# EAGLE board test1 (EAGLE 9.6.2)
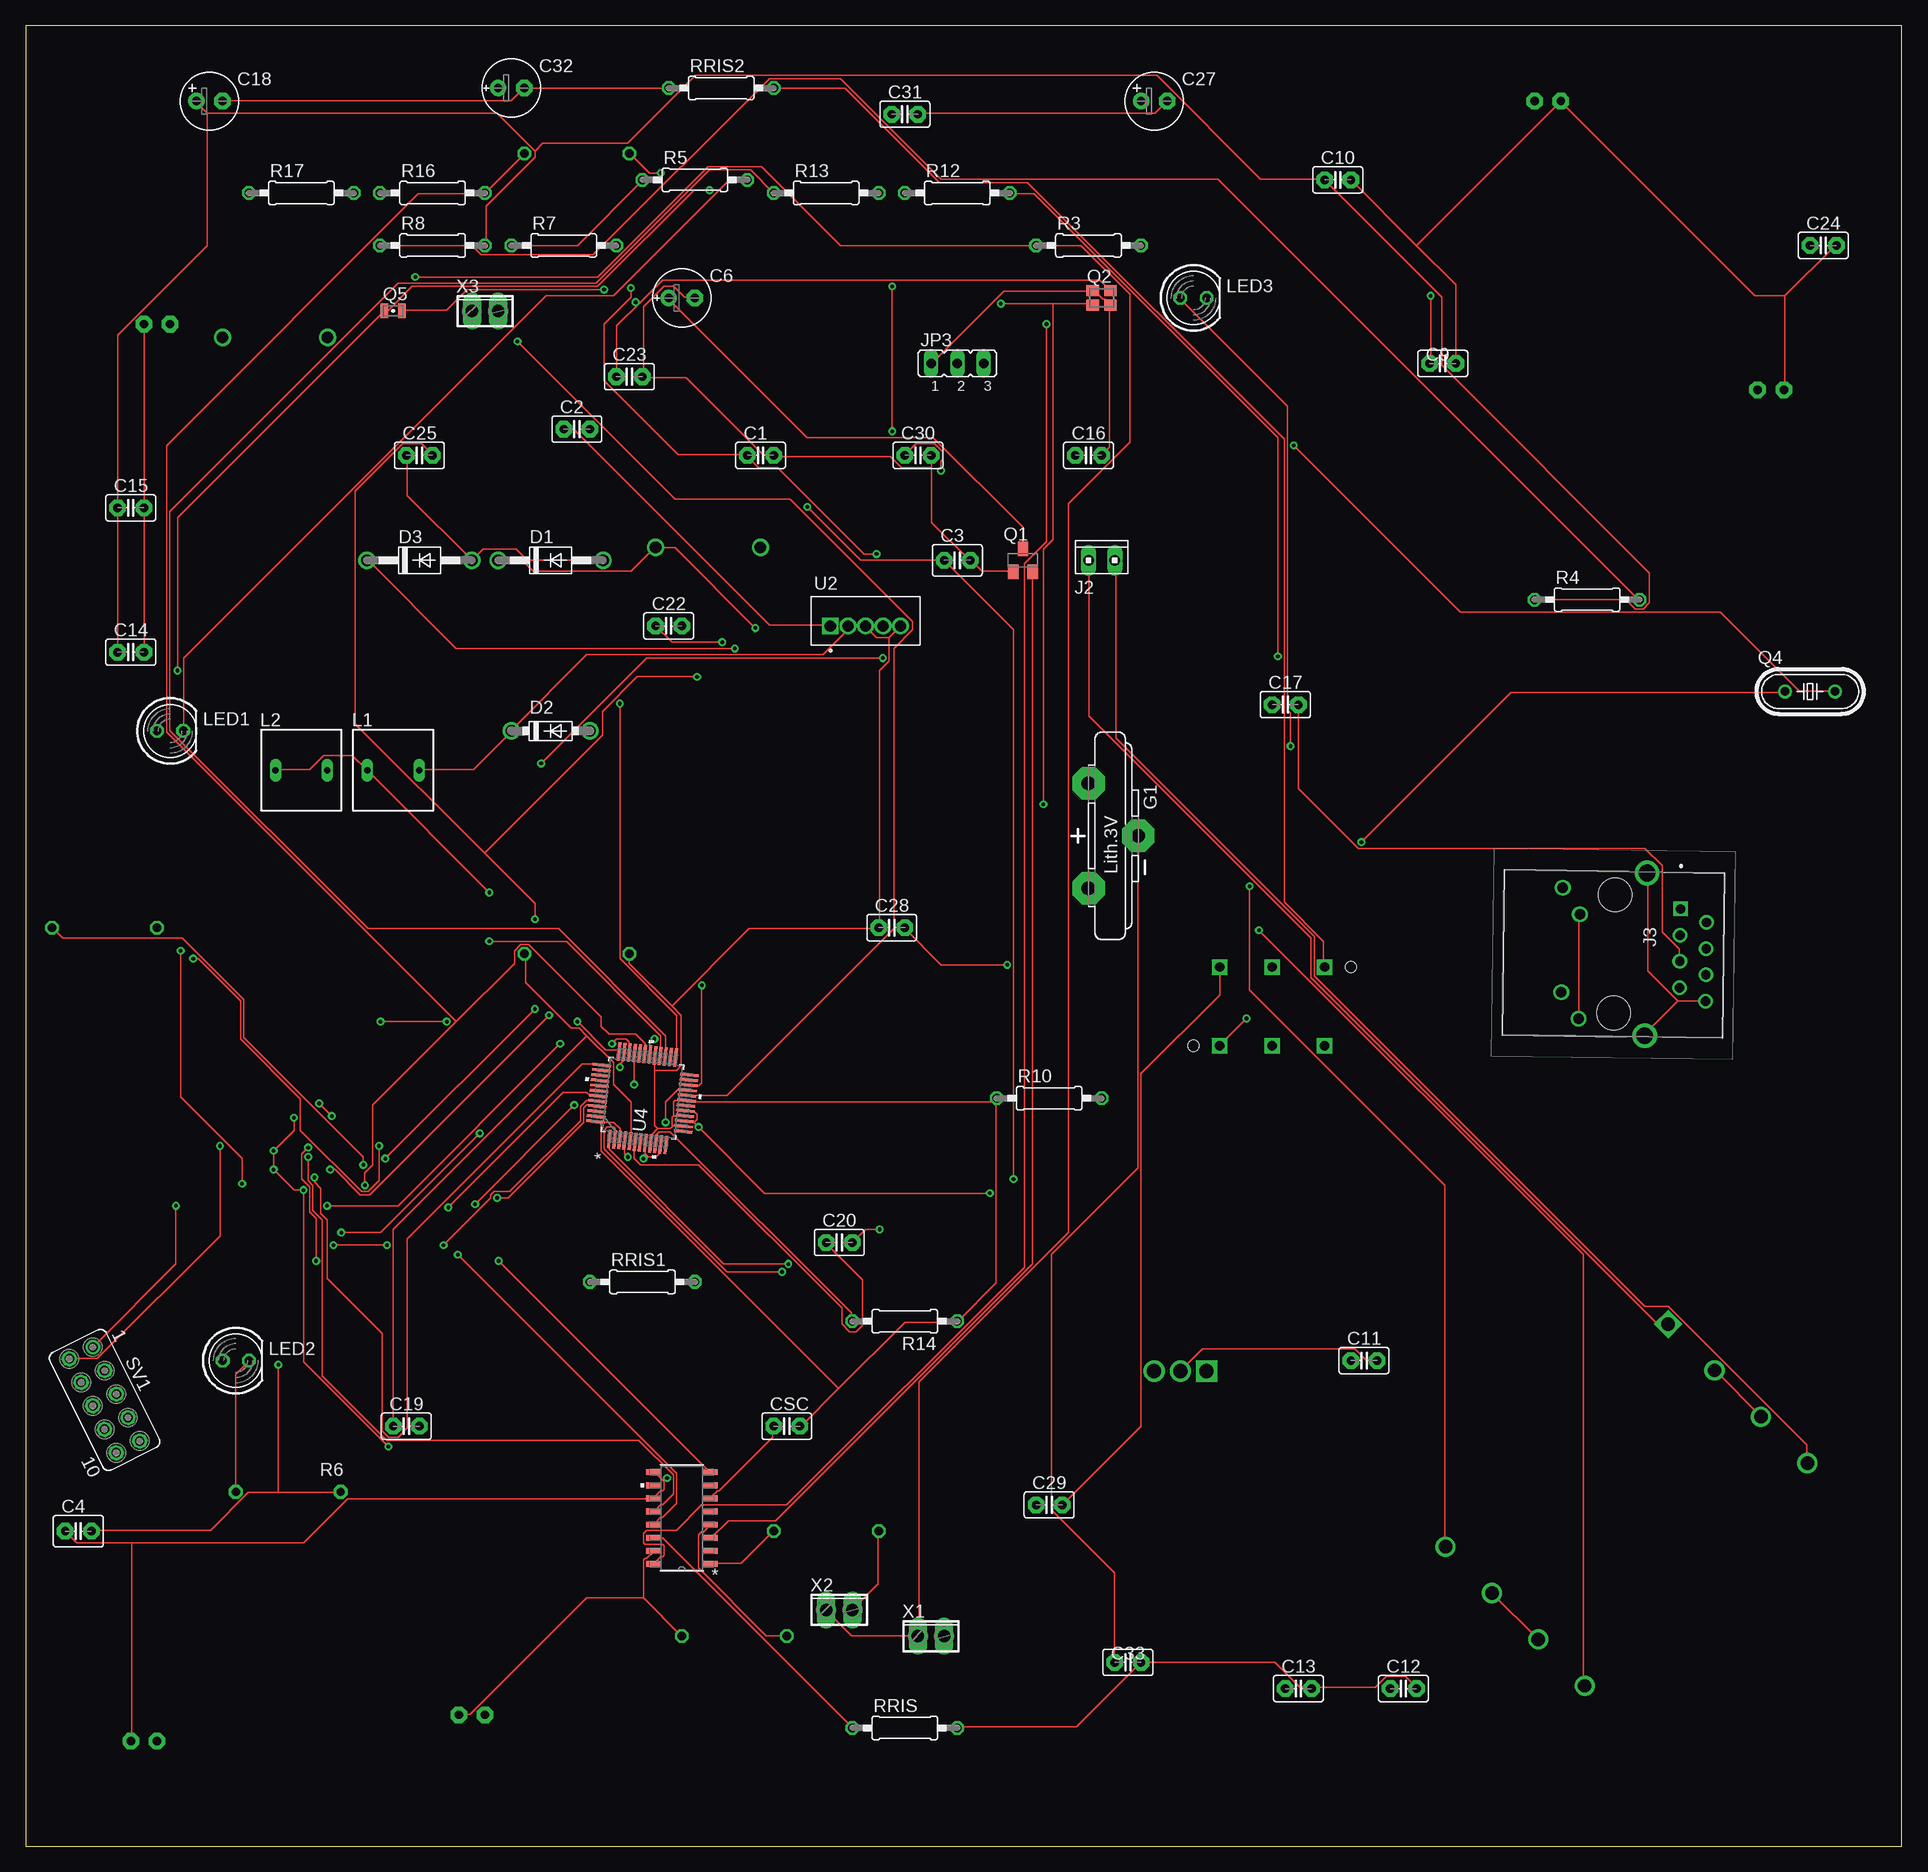
[diagram p0: board, top side]
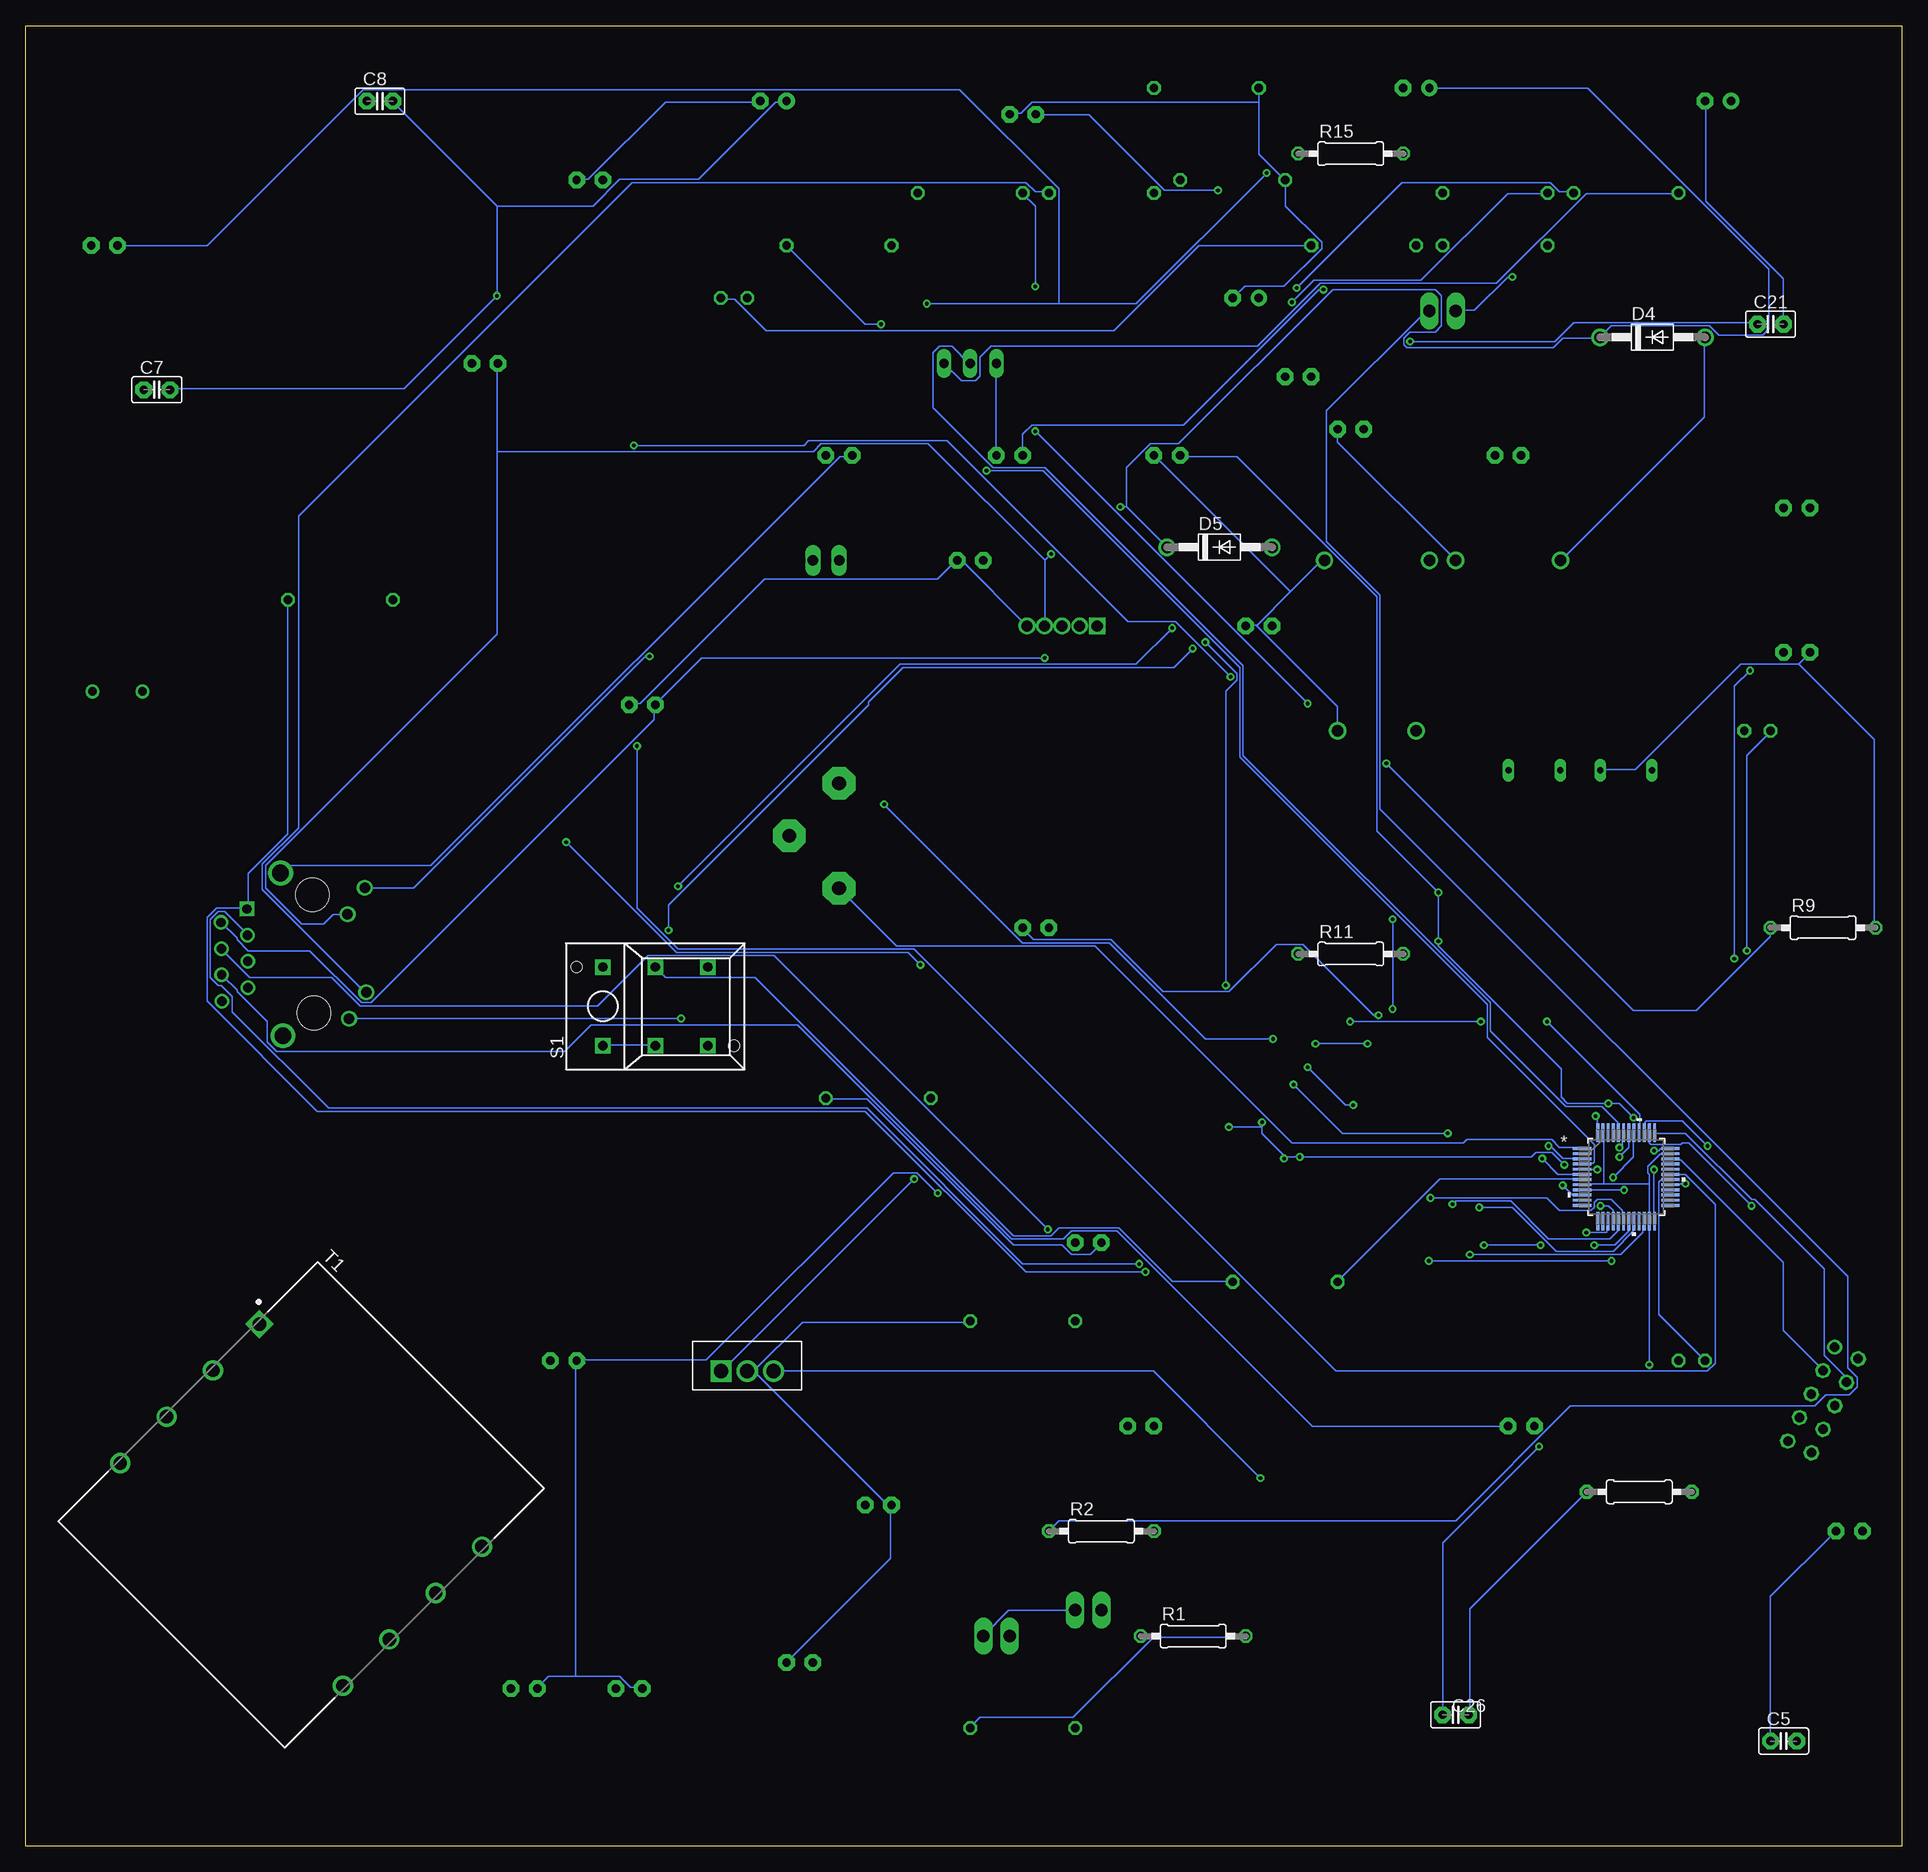
[diagram p1: board, bottom side, seen from below]

Size 181.59 x 176.2 mm. Coordinates in mm from the lower left corner, seen from the top.
Outline: 0,0 181.59,0 181.59,176.2 0,176.2 0,0
Copper layers (1*16): Top 0.035mm / dielectric 1.5mm / Bottom 0.035mm
Design rules "default": minimum track width 6mil, minimum drill 0.35mm, track to track 6mil, track to pad 6mil, pad to pad 6mil, via to via 6mil, smd to smd 6mil, copper to edge 40mil, drill to drill 6mil, minimum pad ring 10mil, minimum via ring 8mil, stop-mask expansion 4mil, vias tented up to drill 0mil, thermal gap 10mil

## Footprints (pad centres in the part's own frame; a part is rotated, then mirrored left to right if it is on the bottom)
C2.5-2 = drill 0.813 pad 1.6 octagon: 1 -1.27,0; 2 1.27,0
C2.5-3 = drill 0.813 pad 1.6 octagon: 1 -1.27,0; 2 1.27,0
E2,5-6E = drill 0.813 pad 1.575: + -1.27,0 | drill 0.813 pad 1.575 octagon: - 1.27,0
E2,5-6 = drill 0.813 pad 1.6: + -1.27,0 | drill 0.813 pad 1.6 octagon: - 1.27,0
DO41-10 = drill 1.118: A 5.08,0; C -5.08,0
DO41-7.6 = drill 1.1 pad 1.7: A 3.81,0; C -3.81,0
CR2032V = drill 1.321 pad 3.15 octagon: + -2.54,-5.08; +@1 -2.54,5.08; - 2.286,0
10X02MTA = drill 1.016 long: 1 1.27,0; 2 -1.27,0
J1B1211CCD = drill 0.9 pad 1.4 square: 1 -4.445,6.45 | drill 0.9 pad 1.4: 2 -3.175,8.99; 3 -1.905,6.45; 4 -0.635,8.99; 5 0.635,6.45; 6 1.905,8.99; 7 3.175,6.45; 8 4.445,8.99 | drill 1.02 pad 1.53: 9 -6.325,-4.98; 10 -3.785,-3.28; 11 3.785,-4.98; 12 6.325,-3.28 | drill 1.6 pad 2.4: 13 -7.875,3.15; 14 7.875,3.15 | hole 3.25: -5.715,0.1; 5.715,0.1
JP2 = drill 0.914 long: 1 -2.54,0; 2 0,0; 3 2.54,0
SD8 = drill 0.6 long: 1 -2.5,0; 2 2.5,0
LED5MM = drill 0.813 octagon: A -1.27,0; K 1.27,0
SOT23 = smd 1 x 1.4: 1 -0.95,-1.1; 2 0.95,-1.1; 3 0,1.1
FA-20H = smd 1.2 x 1.1: 1 -0.85,-0.7; 2 0.85,-0.7; 3 0.85,0.7; 4 -0.85,0.7
HC49/S = drill 0.813: 1 -2.413,0; 2 2.413,0
FC-12M = smd 0.7 x 1.4: 1 -0.85,0; 2 0.85,0
0207/10 = drill 0.813 octagon: 1 -5.08,0; 2 5.08,0
5501-1LED = drill 0.9 pad 1.5 square: 1A 0,3.81; 1B 0,-3.81; + -5.08,-3.81; - -5.08,3.81; NC 5.08,-3.81; NO 5.08,3.81 | hole 1.1: -7.62,3.81; 7.62,-3.81
FE05-2 = drill 0.914: 1 -5.08,1.27 | drill 0.914 octagon: 2 -5.08,-1.27; 3 -2.54,1.27; 4 -2.54,-1.27; 5 0,1.27; 6 0,-1.27; 7 2.54,1.27; 8 2.54,-1.27; 9 5.08,1.27; 10 5.08,-1.27
XFMR_3FD-312 = drill 1.3 square: 1 -15.24,9.525 | drill 1.3: 2 -15.24,3.175; 3 -15.24,-3.175; 4 -15.24,-9.525; 5 15.24,9.525; 6 15.24,3.175; 7 15.24,-3.175; 8 15.24,-9.525
LQFP48_STM-M = smd 1.778 x 0.279: 1 -4.267,2.75; 2 -4.267,2.25; 3 -4.267,1.75; 4 -4.267,1.25; 5 -4.267,0.75; 6 -4.267,0.25; 7 -4.267,-0.25; 8 -4.267,-0.75; 9 -4.267,-1.25; 10 -4.267,-1.75; 11 -4.267,-2.25; 12 -4.267,-2.75; 25 4.267,-2.75; 26 4.267,-2.25; 27 4.267,-1.75; 28 4.267,-1.25; 29 4.267,-0.75; 30 4.267,-0.25; 31 4.267,0.25; 32 4.267,0.75; 33 4.267,1.25; 34 4.267,1.75; 35 4.267,2.25; 36 4.267,2.75 | smd 0.279 x 1.778: 13 -2.75,-4.267; 14 -2.25,-4.267; 15 -1.75,-4.267; 16 -1.25,-4.267; 17 -0.75,-4.267; 18 -0.25,-4.267; 19 0.25,-4.267; 20 0.75,-4.267; 21 1.25,-4.267; 22 1.75,-4.267; 23 2.25,-4.267; 24 2.75,-4.267; 37 2.75,4.267; 38 2.25,4.267; 39 1.75,4.267; 40 1.25,4.267; 41 0.75,4.267; 42 0.25,4.267; 43 -0.25,4.267; 44 -0.75,4.267; 45 -1.25,4.267; 46 -1.75,4.267; 47 -2.25,4.267; 48 -2.75,4.267
TO170P1054X470X1514-5 = drill 1.08 pad 1.48 square: 1 -3.4,0 | drill 1.08 pad 1.48: 2 -1.7,0; 3 0,0; 4 1.7,0; 5 3.4,0
T03B = drill 1.372 pad 1.88 square: 1 -5.08,-1.016 | drill 1.372 pad 1.88: 2 -2.54,-1.016; 3 0,-1.016
48LQFP_W5500_WIZ-M = smd 1.778 x 0.279: 1 -4.267,2.75; 2 -4.267,2.25; 3 -4.267,1.75; 4 -4.267,1.25; 5 -4.267,0.75; 6 -4.267,0.25; 7 -4.267,-0.25; 8 -4.267,-0.75; 9 -4.267,-1.25; 10 -4.267,-1.75; 11 -4.267,-2.25; 12 -4.267,-2.75; 25 4.267,-2.75; 26 4.267,-2.25; 27 4.267,-1.75; 28 4.267,-1.25; 29 4.267,-0.75; 30 4.267,-0.25; 31 4.267,0.25; 32 4.267,0.75; 33 4.267,1.25; 34 4.267,1.75; 35 4.267,2.25; 36 4.267,2.75 | smd 0.279 x 1.778: 13 -2.75,-4.267; 14 -2.25,-4.267; 15 -1.75,-4.267; 16 -1.25,-4.267; 17 -0.75,-4.267; 18 -0.25,-4.267; 19 0.25,-4.267; 20 0.75,-4.267; 21 1.25,-4.267; 22 1.75,-4.267; 23 2.25,-4.267; 24 2.75,-4.267; 37 2.75,4.267; 38 2.25,4.267; 39 1.75,4.267; 40 1.25,4.267; 41 0.75,4.267; 42 0.25,4.267; 43 -0.25,4.267; 44 -0.75,4.267; 45 -1.25,4.267; 46 -1.75,4.267; 47 -2.25,4.267; 48 -2.75,4.267
D16_TEX = smd 1.46 x 0.559: 1 -2.724,4.445; 2 -2.724,3.175; 3 -2.724,1.905; 4 -2.724,0.635; 5 -2.724,-0.635; 6 -2.724,-1.905; 7 -2.724,-3.175; 8 -2.724,-4.445; 9 2.724,-4.445; 10 2.724,-3.175; 11 2.724,-1.905; 12 2.724,-0.635; 13 2.724,0.635; 14 2.724,1.905; 15 2.724,3.175; 16 2.724,4.445
2POL254 = drill 1.2 long: 1 -1.27,0; 2 1.27,0

## Placement (x,y rotation side)
C1  330uF  [C2.5-2]  71.12,134.62 0 top
C2  100uF  [C2.5-2]  53.34,137.16 0 top
C3  44uC  [C2.5-3]  90.17,124.46 0 top
C4  22uC  [C2.5-3]  5.08,30.48 0 top
C5  10uF  [C2.5-2]  11.43,10.16 0 bottom
C6  300  [E2,5-6E]  63.5,149.86 0 top
C7  0.1u  [C2.5-2]  168.91,140.97 0 bottom
C8  0.1u  [C2.5-2]  147.32,168.91 0 bottom
C9  0.1u  [C2.5-2]  137.16,143.51 0 top
C10  0.1u  [C2.5-2]  127,161.29 0 top
C11  0.1u  [C2.5-2]  129.54,46.99 0 top
C12  0.1u  [C2.5-2]  133.35,15.24 0 top
C13  0.1u  [C2.5-2]  123.19,15.24 0 top
C14  o.1u  [C2.5-2]  10.16,115.57 0 top
C15  0.1u  [C2.5-2]  10.16,129.54 0 top
C16  1nF/2kV  [C2.5-2]  102.87,134.62 0 top
C17  22n  [C2.5-2]  121.92,110.49 0 top
C18  10u  [E2,5-6]  17.78,168.91 0 top
C19  22n  [C2.5-2]  36.83,40.64 0 top
C20  22n  [C2.5-2]  78.74,58.42 0 top
C21  4.7uF  [C2.5-2]  12.7,147.32 0 bottom
C22  10nF  [C2.5-2]  62.23,118.11 0 top
C23  18p  [C2.5-2]  58.42,142.24 0 top
C24  18p  [C2.5-2]  173.99,154.94 0 top
C25  12uF  [C2.5-2]  38.1,134.62 0 top
C26  0.1u  [C2.5-2]  43.18,12.7 0 bottom
C27  10u  [E2,5-6]  109.22,168.91 0 top
C28  12uF  [C2.5-2]  83.82,88.9 0 top
C29  12uF  [C2.5-2]  99.06,33.02 0 top
C30  12.5uF  [C2.5-2]  86.36,134.62 0 top
C31  12.5uF  [C2.5-2]  85.09,167.64 0 top
C32  470uF  [E2,5-6E]  46.99,170.18 0 top
C33  1u  [C2.5-2]  106.68,17.78 0 top
CSC  10uF  [C2.5-2]  73.66,40.64 0 top
D1  1N4004  [DO41-10]  50.8,124.46 0 top
D2  1N5819-B  [DO41-7.6]  50.8,107.95 0 top
D3  1N4004  [DO41-10]  38.1,124.46 0 top
D4  1N4004  [DO41-10]  24.13,146.05 0 bottom
D5  1N4004  [DO41-10]  66.04,125.73 0 bottom
G1  CR2032V  [CR2032V]  105.41,97.79 0 top
J2  230V  [10X02MTA]  104.14,124.46 0 top
J3  J1B1211CCD  [J1B1211CCD]  153.67,86.36 269.2 top
JP3  [JP2]  90.17,143.51 0 top
L1  [SD8]  35.56,104.14 0 top
L2  [SD8]  26.67,104.14 0 top
LED1  [LED5MM]  13.97,107.95 0 top
LED2  [LED5MM]  20.32,46.99 0 top
LED3  [LED5MM]  113.03,149.86 0 top
Q1  BSS84  [SOT23]  96.52,124.46 0 top
Q2  29MHz  [FA-20H]  104.14,149.86 0 top
Q4  [HC49/S]  172.72,111.76 0 top
Q5  32.768  [FC-12M]  35.56,148.59 0 top
R1  30k  [0207/10]  68.58,20.32 0 bottom
R2  220  [0207/10]  77.47,30.48 0 bottom
R3  220  [0207/10]  102.87,154.94 0 top
R4  49.9 1%  [0207/10]  151.13,120.65 0 top
R5  [0207/10]  64.77,161.29 0 top
R6  [0207/10]  25.4,34.29 0 bottom
R7  [0207/10]  52.07,154.94 0 top
R8  49.9 1%  [0207/10]  39.37,154.94 0 top
R9  49.9 1%  [0207/10]  7.62,88.9 0 bottom
R10  49R9 1%  [0207/10]  99.06,72.39 0 top
R11  49R9 1%  [0207/10]  53.34,86.36 0 bottom
R12  49.9 1%  [0207/10]  90.17,160.02 0 top
R13  49.9 1%  [0207/10]  77.47,160.02 0 top
R14  12.4k  [0207/10]  85.09,50.8 180 top
R15  1M  [0207/10]  53.34,163.83 0 bottom
R16  0R  [0207/10]  39.37,160.02 0 top
R17  10K  [0207/10]  26.67,160.02 0 top
RRIS  30k  [0207/10]  85.09,11.43 0 top
RRIS1  30k  [0207/10]  59.69,54.61 0 top
RRIS2  30k  [0207/10]  67.31,170.18 0 top
S1  5501-1LED  [5501-1LED]  120.65,81.28 0 bottom
SV1  [FE05-2]  7.62,43.18 296.5 top
T1  3FD-312  [XFMR_3FD-312]  154.94,33.02 315 bottom
U1  STM32F103C8T6LQFP48_STM-M  [LQFP48_STM-M]  26.67,64.77 0 bottom
U2  LM2576-3.3WT  [TO170P1054X470X1514-5]  81.28,118.11 0 top
U3  LM2940CT-5.0/NOPBT03B  [T03B]  109.22,46.99 0 bottom
U4  W550048LQFP_W5500_WIZ-M  [48LQFP_W5500_WIZ-M]  59.69,72.39 83.7 top
U5  TSS721ADD16_TEX  [D16_TEX]  63.5,31.75 180 top
X1  [2POL254]  87.63,20.32 0 top
X2  [2POL254]  78.74,22.86 0 top
X3  [2POL254]  44.45,148.59 0 top

## Library data of the parts
C1-C5 C7-C17 C19-C26 C28-C31 C33 CSC = capacitor-wima
C6 C18 C27 C32 = rcl; SPICEPREFIX: C
D1-D5 = diode
G1 = battery
J2 = con-amp
J3 = J1B1211CCD; DESCRIPTION: Modules Accessories RJ-45 w/ Transformer Connector /CETUS; HEIGHT: mm; MANUFACTURER_NAME: WIZnet Inc; MANUFACTURER_PART_NUMBER: J1B1211CCD
JP3 = jumper
L1 L2 = inductor-neosid; OC_FARNELL: unknown; OC_NEWARK: unknown
LED1-LED3 = led
Q1 = transistor-small-signal
Q2 Q5 = crystal
Q4 = crystal; OC_FARNELL: 1667008; OC_NEWARK: unknown
R1-R17 RRIS RRIS1 RRIS2 = rcl; SPICEPREFIX: R
S1 = switch
SV1 = con-lsta; OC_FARNELL: unknown; OC_NEWARK: unknown
T1 = 3FD-312; AVAILABILITY: In Stock; CHECK_PRICES: https://www.snapeda.com/parts/3FD-312/Tamura/view-part/?ref=eda; DESCRIPTION: PWR XFMR LAMINATED 2.4VA TH; MF: Tamura; MP: 3FD-312; PACKAGE: None; PRICE: None; PURCHASE-URL: https://www.snapeda.com/api/url_track_click_mouser/?unipart_id=283554&manufacturer=Tamura&part_name=3FD-312&search_term=tamura 3fd-312 (transformer); SNAPEDA_LINK: https://www.snapeda.com/parts/3FD-312/Tamura/view-part/?ref=snap
U1 = FYPmcu; COPYRIGHT: Copyright (C) 2024 Ultra Librarian. All rights reserved.; MANUFACTURER_PART_NUMBER: STM32F103C8T6; MFR_NAME: STMicroelectronics
U2 = LM2576-3.3WT; AVAILABILITY: In Stock; CHECK_PRICES: https://www.snapeda.com/parts/LM2576-3.3WT/Microchip/view-part/?ref=eda; DESCRIPTION: Buck Switching Regulator IC Positive Fixed 3.3V 1 Output 3A TO-220-5; MF: Microchip; MP: LM2576-3.3WT; PACKAGE: TO-220 Microchip; PRICE: None; PURCHASE-URL: https://www.snapeda.com/api/url_track_click_mouser/?unipart_id=681089&manufacturer=Microchip&part_name=LM2576-3.3WT&search_term=lm2576-3.3; SNAPEDA_LINK: https://www.snapeda.com/parts/LM2576-3.3WT/Microchip/view-part/?ref=snap
U3 = FYPrugu5; COPYRIGHT: Copyright (C) 2024 Ultra Librarian. All rights reserved.; MANUFACTURER_PART_NUMBER: LM2940CT-5.0/NOPB; MFR_NAME: Texas Instruments; TYPE: LM2940CT-12
U4 = FYP_W5500; COPYRIGHT: Copyright (C) 2024 Ultra Librarian. All rights reserved.; MANUFACTURER_PART_NUMBER: W5500; MFR_NAME: WIZnet
U5 = FYP_Trans; COPYRIGHT: Copyright (C) 2024 Ultra Librarian. All rights reserved.; MANUFACTURER_PART_NUMBER: TSS721AD; MFR_NAME: Texas Instruments
X1-X3 = con-phoenix-254; OC_FARNELL: unknown; OC_NEWARK: unknown

## Nets
ACTLED: R12.1 U4.25
BUSL1: R3.1 X1.1 X2.1 X3.1
BUSL2: R2.1 X1.2 X2.2 X3.2
CGND: C16.1 J3.8 J3.13 J3.14
GND: C1.2 C2.2 C3.2 C4.2 C5.1 C6.- C7.1 C8.1 C9.2 C10.2 C11.2 C12.2 C13.2 C14.2 C15.2 C16.2 C17.2 C18.- C21.2 C22.2 C23.2 C24.2 C25.1 C26.2 C27.- C28.1 C29.1 C30.2 C31.2 C32.- C33.2 CSC.2 D1.A D2.A D3.A J3.5 JP3.1 Q1.1 Q2.2 Q2.4 R1.2 R5.1 R6.1 R7.1 R10.1 R11.1 R14.1 RRIS2.1 RRIS.2 U1.8 U1.23 U1.35 U1.47 U2.3 U2.5 U3.2 U4.3 U4.9 U4.14 U4.16 U4.19 U4.29 U4.48 U5.15
INTN: U1.40 U4.36
JTCK: SV1.4 U1.37
JTDI: SV1.1 U1.38
JTDO: SV1.2 U1.39
JTMS: SV1.3 U1.34
LED1: LED1.A U1.29
LED2: LED2.A U1.30
LED3: LED3.A U1.31
LINKLED: R13.1 U4.27
MISO: U1.16 U4.34
MOSI: U1.17 U4.35
N$1: D2.C L1.2 U2.2
N$2: U1.42 U5.12
N$3: CSC.1 U5.6
N$4: Q1.2 U5.3
N$5: C6.+ Q1.3
N$6: LED1.K R5.2
N$7: LED2.K R6.2
N$8: LED3.K R7.2
N$9: J3.3 U4.1
N$10: J3.1 R4.2 R8.1 U4.2
N$11: C17.1 J3.2 R9.1
N$12: C19.1 R11.2 U4.5
N$13: C21.1 U4.20
N$14: C20.1 R10.2 U4.6
N$15: C20.2 J3.4
N$16: C19.2 J3.6
N$17: J3.11 R13.2
N$18: J3.9 R12.2
N$19: U4.32
N$20: JP3.2 U1.44
N$21: R14.2 U4.10
N$22: C24.1 Q2.1 R15.1 U4.30
N$23: C22.1 U4.22
N$24: C25.2 Q4.2 U1.6
N$25: C23.1 Q2.3 R16.1
N$26: JP3.3 R17.1
N$27: C28.2 Q4.1 U1.5
N$28: C29.2 S1.NO
N$29: RRIS1.2 S1.1A
N$30: RRIS1.1 U1.7
N$31: C31.1 Q5.1 U1.3
N$32: C30.1 Q5.2 U1.4
N$33: G1.+ U1.1
N$34: C33.1 G1.-
N$35: C2.1 U2.1
N$39: S1.1B S1.+
N$40: RRIS2.2 S1.-
N$41: T1.6 T1.7
N$44: J2.2 T1.1
N$45: T1.2 T1.3
N$47: J2.1 T1.4
N$48: D1.C D5.A T1.5
N$51: D3.C D4.A T1.8
PB7: U1.43 U5.8
PF: U5.5
PMODE0: U1.18 U4.45
PMODE1: U1.19 U4.44
PMODE2: U1.20 U4.43
RIDD: R1.1 U5.4
RIS: RRIS.1 U5.14
RL1: R3.2 U5.16
RL2: R2.2 U5.1
RSTN: U1.41 U4.37
RXI: U1.22 U5.13
SCLK: U1.15 U4.33
SCSN: R15.2 R16.2 U1.10 U4.31
V3.3: C1.1 C7.2 C8.2 C9.1 C26.1 C27.+ J3.10 J3.12 L1.1 L2.1 R17.2 S1.NC U1.9 U1.24 U1.36 U1.48 U2.4 U4.28
V3.3A: C10.1 C11.1 C12.1 C13.1 C14.1 C15.1 C18.+ L2.2 R4.1 R8.2 R9.2 U4.4 U4.8 U4.11 U4.15 U4.17 U4.21
V5.0: C4.1 C5.2 U3.3 U5.9 U5.11
VIN: C3.1 C32.+ D4.C D5.C U3.1

## Tracks (layer width: path | path; a pad name or v marks a point on that pad's centre or on a via)
ACTLED  (via drill 0.35)
  Top 0.152: v57.51,110.59 57.51,85.9 62.99,80.42 62.99,76.45 U4.25 | v83.87,150.98 v83.87,136.96
  Bottom 0.152: v83.87,136.96 v57.51,110.59 | v83.87,150.98 83.87,158.75 85.09,159.97 R12.1
BUSL1  (via drill 0.35)
  Top 0.152: X2.1 77.47,22.81 79.91,20.37 86.31,20.37 X1.1 86.46,20.37 86.46,44.91 100.94,59.39 100.94,129.95 106.88,135.89 106.88,150.22 102.16,154.94 R3.1 78.84,154.94 71.22,162.56 66.04,162.56 55.37,151.89 v37.69,151.89
  Bottom 0.152: v37.69,151.89 38.15,151.89 41.35,148.69 43.18,148.69 X3.1
BUSL2
  Top 0.152: R2.1 82.5,30.43 82.5,25.4 80.06,22.96 X2.2
  Bottom 0.152: X1.2 88.9,20.37 86.46,22.81 80.06,22.81 X2.2 | X3.2 45.77,148.54 46.08,148.54 55.68,138.94 55.68,126.29 50.5,121.11 50.5,100.38 5.23,55.12 5.23,46.28 4.32,45.36 4.32,44.45 5.08,43.69 7.37,43.69 8.43,42.62 32.06,42.62 43.18,31.5 81.59,31.5 82.5,30.58 R2.1
CGND
  Top 0.152: 159.92,81.79 162.51,81.79 J3.8 | 159.92,81.79 156.72,78.59 J3.14 | 159.92,81.79 157.02,84.68 157.02,94.13 J3.13
  Bottom 0.152: C16.1 101.7,134.52 102.77,134.52 142.39,94.89 156.26,94.89 156.87,94.28 J3.13
GND  (via drill 0.35)
  Top 0.152: 59.79,24.03 59.79,27.69 59.94,27.84 60.1,27.84 60.71,28.45 U5.15 | R1.2 59.79,24.03 | 59.79,24.03 54.31,24.03 43.03,12.75 41.96,12.75 C26.2 | 24.44,34.24 21.54,34.24 17.88,30.58 6.45,30.58 C4.2 | 24.44,34.24 30.38,34.24 R6.1 | 24.44,34.24 v24.44,46.58 | 55.68,70.05 55.22,70.05 U4.48 55.68,70.05 | 55.68,70.05 56.9,70.05 57.51,69.44 57.51,68.38 U4.3 | 78.69,44.3 75.03,40.64 CSC.2 | 78.69,44.3 85.09,50.7 90.12,50.7 R14.1 90.27,50.85 93.93,54.51 93.93,72.03 | 93.93,72.03 93.93,72.34 R10.1 93.93,72.03 | 55.68,70.05 55.68,67.31 78.69,44.3 | U3.2 113.89,48.11 128.68,48.11 129.74,47.04 130.81,47.04 C11.2 | C12.2 134.62,15.34 133.55,16.41 131.72,16.41 130.66,15.34 124.56,15.34 C13.2 124.41,15.34 123.34,15.34 120.9,17.78 C33.2 101.7,11.53 90.27,11.53 RRIS.2 | 170.28,150.06 170.28,141.07 C7.1 | 170.28,150.06 175.16,154.94 C24.2 | C9.2 138.43,151.13 134.62,154.94 | C10.2 134.62,154.94 | C27.- 109.32,167.74 86.46,167.74 C31.2 | 134.62,154.94 C8.1 148.64,168.81 167.39,150.06 170.28,150.06 | C17.2 123.19,102.36 128.98,96.57 156.72,96.57 158.39,94.89 158.39,88.49 160.07,86.82 160.07,85.75 J3.5 | C14.2 11.48,115.62 11.48,129.49 C15.2 11.48,129.64 11.48,147.32 C21.2 | C25.1 36.93,134.52 36.93,130.71 D3.A 44.25,125.53 47.45,125.53 48.51,124.46 D1.A | 61.16,69.44 60.55,68.83 60.55,68.07 U4.9 | 61.16,69.44 62.38,69.44 62.54,69.6 | 62.54,69.6 62.69,69.75 63.6,69.75 U4.14 | 62.69,70.66 63.75,70.66 U4.16 | 62.69,70.66 62.54,70.51 62.54,69.6 | 60.86,75.08 60.86,69.75 61.16,69.44 | 60.86,75.08 60.86,76.45 U4.29 | 62.69,70.66 62.69,72.03 62.84,72.19 63.91,72.19 U4.19 64.06,72.03 93.93,72.03 | R11.1 58.42,85.45 62.54,81.33
  Top 0.152: 62.54,81.33 63.45,80.42 63.45,75.54 62.99,75.08 60.86,75.08 | 62.54,81.33 70,88.8 82.5,88.8 C28.1 82.65,88.95 82.65,113.79 83.57,114.71 83.57,116.99 | R7.1 53.39,154.94 59.64,161.19 R5.1 | RRIS2.1 C32.- 48.21,170.18 46.99,168.96 19.1,168.96 C18.- | C6.- 64.67,149.91 63.75,149.91 62.69,150.98 61.77,150.98 59.79,149 59.79,142.29 C23.2 59.79,142.14 63.91,142.14 71.37,134.67 72.29,134.67 C1.2 72.44,134.52 83.72,134.52 84.78,133.45 87.68,133.45 | C16.2 104.14,134.67 104.9,135.43 104.9,149.15 Q2.2 104.9,149.3 104.45,149.76 104.29,149.76 103.38,150.67 Q2.4 103.23,150.52 94.69,150.52 87.68,143.51 JP3.1 | Q1.1 95.45,123.39 92.56,123.39 91.49,124.46 C3.2 91.34,124.46 87.68,128.12 87.68,133.45 | 83.57,116.99 82.35,116.99 81.28,118.06 U2.3 | 83.57,116.99 84.63,118.06 U2.5 | 87.68,133.45 87.68,134.52 C30.2
  Bottom 0.152: 24.44,64.11 24.44,65.02 24.59,65.18 24.59,65.79 23.37,67 22.45,67 U1.35 | 24.44,64.11 24.44,60.6 U1.23 24.44,60.45 v24.44,46.58 | 24.44,64.11 28.85,64.11 | 28.85,64.11 30.84,64.11 U1.8 | 28.85,64.11 28.85,68.99 U1.47 | C5.1 12.7,24.18 6.45,30.43 C4.2 | R6.1 41.81,22.96 41.81,12.75 C26.2 | 97.89,32.72 97.89,27.84 C33.2 | 97.89,32.72 97.89,33.02 C29.1 97.89,32.72 | 97.89,32.72 111.15,45.97 | 111.15,45.97 106.43,50.7 90.27,50.7 R14.1 | 111.15,45.97 U3.2 | R1.2 63.6,20.22 72.44,20.22 80.21,12.45 89.21,12.45 90.12,11.53 RRIS.2 | C10.2 128.22,161.34 127.15,161.34 119.69,168.81 110.54,168.81 C27.- | C18.- 18.95,168.81 18.95,159.21 11.48,151.74 11.48,147.32 C21.2 | 62.54,118.21 62.38,118.21 59.18,121.41 | 62.54,118.21 63.45,118.21 C22.2 | 59.18,121.41 56.13,124.46 D1.A | D2.A 54.61,110.29 62.54,118.21 | C2.2 54.61,135.89 D3.A | 62.23,168.81 62.23,163.78 59.79,161.34 R5.1 59.64,161.19 59.64,158.75 56.13,155.25 56.13,154.63 59.79,150.98 63.6,150.98 64.67,149.91 C6.- | 62.23,168.81 RRIS2.1 | JP3.1 87.68,143.51 87.68,134.67 C30.2 | U2.5 84.78,118.21 91.03,124.46 C3.2 91.49,124.46 93.32,122.63 110.08,122.63 122.12,110.59 123.19,110.59 C17.2 | C1.2 59.18,121.41 | 62.23,168.81 84.18,168.81 85.24,167.74 86.31,167.74 C31.2
INTN  (via drill 0.35)
  Top 0.152: v40.74,79.81 v34.34,79.81 | v53.39,79.81 56.13,77.06 57.35,77.06 U4.36
  Bottom 0.152: v34.34,79.81 25.35,70.81 25.35,69.14 U1.40 | v53.39,79.81 v40.74,79.81
JTCK
  Bottom 0.152: U1.37 23.83,68.99 20.93,68.99 14.53,62.59 14.22,62.59 7.52,55.88 7.52,47.5 5.38,45.36 5.38,44.91 SV1.4
JTDI  (via drill 0.35)
  Top 0.152: v14.53,61.98 14.53,56.34 6.6,48.41 SV1.1
  Bottom 0.152: v14.53,61.98 20.62,68.07 21.23,68.07 21.39,67.92 24.28,67.92 24.44,68.07 24.44,68.99 U1.38
JTDO  (via drill 0.35)
  Top 0.152: v18.8,67.77 18.8,59.08 6.91,47.19 4.32,47.19 SV1.2
  Bottom 0.152: v18.8,67.77 21.23,70.21 24.74,70.21 24.89,70.05 24.89,69.14 U1.39
JTMS
  Bottom 0.152: U1.34 22.3,66.4 21.39,66.4 11.48,56.49 11.48,49.94 7.67,46.13 SV1.3
LED1  (via drill 0.35)
  Top 0.152: v20.93,64.11 20.93,66.55 14.99,72.49 v14.99,86.66
  Bottom 0.152: v20.93,64.11 22.3,64.11 U1.29 | v14.99,86.66 14.99,105.56 12.7,107.85 LED1.A
LED2
  Bottom 0.152: LED2.A 23.52,51.46 23.52,64.26 23.37,64.41 22.45,64.41 U1.30
LED3  (via drill 0.35)
  Top 0.152: v122.43,106.48 122.43,109.68 122.12,109.98 122.12,139.4 111.76,149.76 LED3.A
  Bottom 0.152: v122.43,106.48 122.43,90.78 118.47,86.82 95.61,86.82 54.76,45.97 18.8,45.97 18.03,46.74 18.03,62.13 20.93,65.02 22.3,65.02 U1.31
LINKLED
  Top 0.152: R13.1 70.16,162.25 66.19,162.25 55.22,151.28 36.02,151.28 13.92,129.18 13.92,108 33.12,88.8 51.56,88.8 61.93,78.44 61.93,76.45 U4.27
MISO  (via drill 0.35)
  Top 0.152: v29.16,61.98 36.02,61.98 v51.71,77.67 | v56.74,77.67 57.2,78.13 58.12,78.13 58.42,77.83 58.42,76.91 U4.34
  Bottom 0.152: v29.16,61.98 28.4,61.98 27.94,61.52 27.94,60.6 U1.16 | v56.74,77.67 v51.71,77.67
MOSI  (via drill 0.35)
  Top 0.152: v53.09,71.73 v43.48,62.13 | v57.51,75.39 57.51,75.69 57.81,76 57.81,76.76 U4.35
  Bottom 0.152: v43.48,62.13 43.18,62.43 37.85,62.43 34.19,58.78 28.25,58.78 27.48,59.54 27.48,60.45 U1.17 | v53.09,71.73 53.85,71.73 v57.51,75.39
N$1
  Top 0.152: L1.2 38.15,104.19 43.33,104.19 46.99,107.85 D2.C 46.99,108 54.31,115.32 77.17,115.32 79.45,117.6 79.45,118.06 U2.2
N$2  (via drill 0.35)
  Top 0.152: v27.33,66.7 27.33,64.41 27.79,63.96 27.79,61.52 28.7,60.6 28.7,45.52 34.95,39.27 59.33,39.27 62.69,35.92 62.69,34.09 61.62,33.02 61.47,33.02 60.86,32.41 U5.12
  Bottom 0.152: v27.33,66.7 26.42,67.62 26.42,68.99 U1.42
N$3
  Top 0.152: U5.6 66.34,33.78 66.95,34.39 67.11,34.39 72.29,39.57 72.29,40.64 CSC.1
N$4
  Top 0.152: Q1.2 97.43,123.24 97.43,56.34 72.59,31.5 68.02,31.5 66.34,29.82 U5.3
N$5
  Top 0.152: Q1.3 96.52,127.66 87.83,136.35 75.64,136.35 62.23,149.76 C6.+
N$6
  Top 0.152: LED1.K 15.29,108 15.29,115.01 50.34,150.06 56.9,150.06 68.02,161.19 69.85,161.19 R5.2
N$7
  Top 0.152: R6.2 20.32,45.67 21.54,46.89 LED2.K
N$8
  Bottom 0.152: R7.2 68.02,154.94 76.25,146.71 109.93,146.71 112.98,149.76 114.2,149.76 LED3.K
N$9  (via drill 0.35)
  Top 0.152: v73.81,56.34 67.56,56.34 56.44,67.46 56.44,68.38 U4.1
  Bottom 0.152: v73.81,56.34 85.09,56.34 100.18,71.43 152.3,71.43 161.59,80.72 161.59,82.25 162.66,83.31 162.97,83.31 163.73,84.07 163.73,89.71 162.97,90.47 162.36,90.47 160.07,88.19 J3.3
N$10  (via drill 0.35)
  Top 0.152: v73.2,55.58 67.87,55.58 55.98,67.46 55.98,69.29 56.29,69.6 56.9,69.6 57.05,69.44 57.05,68.53 U4.2 | R8.1 43.18,154.94 44.09,154.03 54.92,154.03 71.98,171.09 78.84,171.09 88.59,161.34 115.42,161.34 156.11,120.65 R4.2
  Bottom 0.152: v73.2,55.58 84.78,55.58 100.33,71.12 153.37,71.12 164.03,81.79 164.03,89.87 163.12,90.78 160.22,90.78 J3.1 160.07,90.78 160.07,94.13 156.26,97.94 156.26,120.65 R4.2
N$11  (via drill 0.35)
  Top 0.152: v49.89,104.8 60.1,115.01 v82.96,115.01
  Bottom 0.152: R9.1 12.7,88.04 19.86,80.87 25.96,80.87 v49.89,104.8 | v82.96,115.01 116.18,115.01 120.6,110.59 C17.1 120.75,110.44 120.75,109.07 148.18,81.64 149.1,81.64 154.13,86.66 160.07,86.66 161.14,87.73 161.14,87.88 162.66,89.41 J3.2
N$12
  Top 0.152: 54.31,78.44 53.54,79.2 52.78,79.2 48.36,83.62 48.36,86.36 R11.2 | 54.31,78.44 56.9,75.84 56.9,73.71 58.57,72.03 58.57,68.38 U4.5 | C19.1 35.56,59.69 54.31,78.44
N$13  (via drill 0.35)
  Top 0.152: v47.6,145.64 62.84,130.4 73.97,130.4 85.85,118.52 85.85,117.75 84.02,115.93 84.02,88.8 67.87,72.64 64.06,72.64 U4.20
  Bottom 0.152: v47.6,145.64 33.58,145.64 31.75,147.47 14.22,147.47 14.07,147.32 C21.1
N$14
  Top 0.152: U4.6 58.88,68.07 58.88,66.55 59.49,65.94 65.13,65.94 78.99,52.07 78.99,50.55 79.76,49.78 80.37,49.78 80.97,50.39 80.97,54.81 77.47,58.32 C20.1
  Bottom 0.152: R10.2 104.14,72.34 100.18,72.34 86,58.17 81.28,58.17 80.37,57.25 78.54,57.25 77.47,58.32 C20.1
N$15  (via drill 0.35)
  Top 0.152: v82.65,59.69 81.28,59.69 C20.2
  Bottom 0.152: v82.65,59.69 109.17,86.21 121.36,86.21 126.24,81.33 149.25,81.33 151.99,84.07 159.92,84.07 162.66,86.82 J3.4
N$16
  Bottom 0.152: C19.2 57.05,40.64 75.95,59.54 80.37,59.54 81.13,58.78 86.16,58.78 106.88,79.5 126.85,79.5 129.44,76.91 157.33,76.91 158.24,77.83 158.24,79.81 161.14,82.7 161.14,82.86 162.51,84.23 J3.6
N$17
  Bottom 0.152: R13.2 82.65,160.12 83.87,160.12 84.78,161.04 122.89,161.04 155.19,128.73 155.19,98.55 158.7,95.05 158.7,92.61 148.64,82.55 J3.11
N$18  (via drill 0.35)
  Top 0.152: v121.21,115.16 121.21,136.35 97.59,159.97 95.3,159.97 R12.2
  Bottom 0.152: v121.21,115.16 121.67,115.16 144.07,92.76 148.64,92.76 J3.9
N$20
  Bottom 0.152: U1.44 27.48,69.14 27.48,70.05 29.01,71.58 32.51,71.58 39.83,78.89 39.83,81.64 63.75,105.56 63.75,114.25 82.96,133.45 87.99,133.45 93.78,139.24 93.78,144.58 93.17,145.19 91.95,145.19 90.27,143.51 JP3.2
N$21
  Top 0.152: U4.10 61.01,68.07 61.01,68.83 61.32,69.14 62.38,69.14 79.91,51.61 79.91,50.85 R14.2
N$22  (via drill 0.35)
  Top 0.152: v94.39,149.3 99.42,149.3 | 99.42,149.3 103.23,149.3 Q2.1 | v61.47,161.95 60.4,161.95 58.42,163.93 R15.1 | v60.86,78.13 60.4,77.67 U4.30 | v98.5,100.84 98.5,125.53 99.42,126.44 99.42,149.3
  Bottom 0.152: 81.59,149.3 74.12,149.3 v61.47,161.95 | 81.59,149.3 v94.39,149.3 | v60.86,78.13 67.41,78.13 76.71,87.43 85.09,87.43 v98.5,100.84 | C24.1 164.03,154.94 148.95,170.03 91.19,170.03 81.59,160.43 81.59,149.3
N$23  (via drill 0.35)
  Top 0.152: v65.43,83.31 65.43,73.86 65.13,73.56 64.21,73.56 U4.22 | v67.41,116.53 62.54,116.53 C22.1
  Bottom 0.152: v65.43,83.31 65.43,111.81 64.36,112.88 64.36,113.49 v67.41,116.53
N$24  (via drill 0.35)
  Top 0.152: v49.28,81.03 v34.8,66.55 | v49.28,89.71 49.28,91.24 44.4,96.11 | 44.4,96.11 31.9,108.61 31.9,131.17 36.47,135.74 38.3,135.74 39.37,134.67 C25.2 | v122.73,135.59 138.89,119.43 164.03,119.43 171.65,111.81 175.01,111.81 Q4.2 | v64.97,113.18 59.18,113.18 55.83,109.83 55.83,107.54 44.4,96.11
  Bottom 0.152: v34.8,66.55 33.27,65.02 30.99,65.02 U1.6 | v49.28,89.71 v49.28,81.03 | v122.73,135.59 106.27,135.59 105.82,136.04 92.41,136.04 74.88,118.52 70.31,118.52 v64.97,113.18
N$25  (via drill 0.35)
  Top 0.152: 59.49,149.45 57.2,147.17 57.2,142.29 C23.1 | 59.49,149.45 61.62,151.59 103.99,151.59 104.9,150.67 Q2.3 | 59.49,149.45 v59.03,149.45
  Bottom 0.152: v59.03,149.45 56.9,151.59 46.53,151.59 38.15,159.97 34.34,159.97 R16.1
N$26
  Bottom 0.152: JP3.3 91.03,141.83 89.66,141.83 89.21,142.29 89.21,144.12 88.14,145.19 62.38,145.19 56.29,151.28 39.22,151.28 30.53,159.97 21.69,159.97 R17.1
N$27  (via drill 0.35)
  Top 0.152: v29.46,65.48 29.92,65.48 32.36,63.04 33.27,63.04 v50.65,80.42 | v129.29,97.18 143.76,111.66 170.28,111.66 Q4.1 | v95,85.29 88.59,85.29 85.09,88.8 C28.2
  Bottom 0.152: v29.46,65.48 30.84,65.48 U1.5 | v50.65,80.42 51.11,80.42 57.96,87.27 60.55,87.27 65.13,82.7 71.53,82.7 76.56,87.73 84.02,87.73 85.09,88.8 C28.2 | v129.29,97.18 118.62,86.51 96.22,86.51 v95,85.29
N$28
  Top 0.152: S1.NO 115.57,82.4 107.95,74.78 107.95,40.64 C29.2
N$29
  Bottom 0.152: RRIS1.2 64.82,54.66 70.61,54.66 75.79,59.84 81.59,59.84 82.35,59.08 86,59.08 111,84.07 119.69,84.07 120.6,84.99 S1.1A
N$30
  Bottom 0.152: U1.7 30.99,64.57 44.7,64.57 54.61,54.66 RRIS1.1
N$31  (via drill 0.35)
  Top 0.152: v66.19,160.27 64.67,160.27 55.37,150.98 37.39,150.98 35.1,148.69 34.8,148.69 Q5.1 34.65,148.54 14.68,128.57 v14.68,113.79 | v34.19,67.77 34.19,64.41 33.12,63.35 32.51,63.35 26.57,69.29 26.57,72.34 20.78,78.13 20.78,81.79 16.66,85.9 v16.2,85.9
  Bottom 0.152: v66.19,160.27 71.37,160.27 78.69,167.59 83.72,167.59 C31.1 | v34.19,67.77 34.04,67.77 32.82,66.55 30.99,66.55 U1.3 | v16.2,85.9 16.2,112.27 v14.68,113.79
N$32  (via drill 0.35)
  Top 0.152: v55.98,150.67 42.72,150.67 40.74,148.69 36.47,148.69 Q5.2 | v88.59,133.15 88.59,134.06 88.75,134.21 88.75,134.98 87.99,135.74 86.16,135.74 85.09,134.67 C30.1
  Bottom 0.152: v55.98,150.67 56.44,150.67 69.55,137.57 84.18,137.57 85.09,136.65 C30.1 | v88.59,133.15 83.11,133.15 64.06,114.1 64.06,105.41 40.13,81.48 40.13,78.28 29.77,67.92 29.77,66.24 29.92,66.09 30.84,66.09 U1.4
N$33
  Bottom 0.152: G1.+ 97.28,87.12 78.08,87.12 59.03,68.07 42.42,68.07 42.11,68.38 33.88,68.38 33.12,67.62 30.99,67.62 U1.1
N$34
  Top 0.152: C33.1 105.36,17.78 105.36,26.47 99.26,32.56 99.26,57.25 107.65,65.63 107.65,97.79 G1.-
N$35
  Top 0.152: C2.1 52.17,137.11 53.09,137.11 71.98,118.21 77.78,118.21 U2.1
N$39
  Bottom 0.152: S1.1B 120.75,77.52 125.63,77.52 S1.+
N$40
  Top 0.152: RRIS2.2 79.3,170.18 88.44,161.04 96.98,161.04 121.82,136.19 121.82,91.39 125.63,87.58 125.63,85.14 S1.-
N$41
  Top 0.152: T1.6 141.94,24.49 146.36,20.07 T1.7
N$44
  Top 0.152: J2.2 102.92,124.46 102.92,109.37 124.41,87.88 124.41,84.07 157.94,50.55 158.85,50.55 T1.1
N$45
  Top 0.152: T1.2 163.58,45.97 168,41.55 T1.3
N$47
  Top 0.152: J2.1 105.51,124.46 105.51,107.24 124.71,88.04 124.71,84.23 156.72,52.22 159,52.22 172.42,38.81 172.42,37.13 T1.4
N$48  (via drill 0.35)
  Top 0.152: D1.C 48.06,124.46 49.12,123.39 58.57,123.39 60.86,125.68 D5.A 61.01,125.68 62.84,125.68 v70.61,117.91 | v118.47,92.91 118.47,82.86 137.36,63.96 137.36,29.06 T1.5
  Bottom 0.152: v118.47,92.91 96.98,114.4 74.12,114.4 v70.61,117.91
N$51  (via drill 0.35)
  Top 0.152: v119.38,88.65 150.77,57.25 150.77,15.65 T1.8 | v68.63,115.93 41.66,115.93 33.12,124.46 D3.C
  Bottom 0.152: D4.A 19.1,145.95 19.1,138.33 32.97,124.46 D3.C | v119.38,88.65 119.38,91.08 100.03,110.44 100.03,110.74 96.67,114.1 70.46,114.1 v68.63,115.93
PB7  (via drill 0.35)
  Top 0.152: v45.77,56.64 66.19,36.22 U5.8 | v28.09,56.64 28.09,60.76 27.48,61.37 27.48,63.8 26.72,64.57 26.72,67 v27.33,67.62
  Bottom 0.152: v28.09,56.64 v45.77,56.64 | v27.33,67.62 27.03,67.92 27.03,68.99 U1.43
PMODE0  (via drill 0.35)
  Top 0.152: v45.62,62.74 46.69,62.74 54,70.05 54,71.43 54.31,71.73 55.22,71.73 U4.45
  Bottom 0.152: v45.62,62.74 34.34,62.74 33.12,61.52 30.07,61.52 29.77,61.82 29.77,62.28 29.46,62.59 28.09,62.59 27.03,61.52 27.03,60.6 U1.18
PMODE1  (via drill 0.35)
  Top 0.152: v34.95,58.17 v29.77,58.17 | v40.44,58.17 45.01,62.74 45.01,63.04 45.31,63.35 46.84,63.35 53.7,70.21 53.7,71.58 54.31,72.19 55.22,72.19 U4.44
  Bottom 0.152: v29.77,58.17 27.79,58.17 26.42,59.54 26.42,60.45 U1.19 | v40.44,58.17 v34.95,58.17
PMODE2  (via drill 0.35)
  Top 0.152: v40.89,61.82 52.02,72.95 54.31,72.95 54.61,72.64 55.37,72.64 U4.43
  Bottom 0.152: v40.89,61.82 37.69,61.82 33.43,57.56 27.94,57.56 25.96,59.54 25.96,60.45 U1.20
RIDD
  Top 0.152: U5.4 66.19,31.04 65.58,30.43 65.43,30.43 65.13,30.12 65.13,26.92 71.68,20.37 73.66,20.37 R1.1
RIS
  Top 0.152: RRIS.1 61.62,29.82 60.86,29.82 U5.14
RL1  (via drill 0.35)
  Top 0.152: v98.81,147.32 98.81,126.29 96.67,124.16 96.67,56.03 73.66,33.02 65.43,33.02 62.99,30.58 60.1,30.58 59.79,30.28 59.79,29.36 59.94,29.21 61.62,29.21 61.77,29.06 61.77,28.14 61.62,27.99 61.47,27.99 60.86,27.38 U5.16
  Bottom 0.152: v98.81,147.32 100.33,147.32 R3.2
RL2
  Top 0.152: U5.1 66.34,27.38 69.24,27.38 72.29,30.43 R2.2
RSTN  (via drill 0.35)
  Top 0.152: v27.94,64.72 27.94,64.26 28.55,63.65 28.55,61.21 29.16,60.6 29.16,54.97 34.49,49.63 34.49,40.18 35.1,39.57 36.02,39.57 36.93,40.49 36.93,58.78 53.85,75.69 55.68,75.69 U4.37
  Bottom 0.152: v27.94,64.72 25.96,66.7 25.96,68.99 U1.41
RXI  (via drill 0.35)
  Top 0.152: v41.81,57.25 62.99,36.07 62.99,33.17 61.62,31.8 61.47,31.8 60.86,31.19 U5.13
  Bottom 0.152: v41.81,57.25 27.18,57.25 25.04,59.39 25.04,60.45 U1.22
SCLK  (via drill 0.35)
  Top 0.152: v30.53,59.39 34.34,59.39 v43.94,68.99 | v58.88,73.71 58.88,76.76 U4.33
  Bottom 0.152: v30.53,59.39 28.55,59.39 28.55,60.45 U1.15 | v43.94,68.99 54.15,68.99 v58.88,73.71
SCSN  (via drill 0.35)
  Top 0.152: R15.2 R16.2 44.4,159.97 38,159.97 13.61,135.59 13.61,107.85 41.66,79.81 | v32.82,63.96 32.82,65.18 33.58,65.94 33.58,71.73 41.66,79.81 | 41.66,79.81 47.3,85.45 47.3,86.66 47.9,87.27 48.67,87.27 55.68,80.26 55.68,79.35 56.44,78.59 59.03,78.59 59.94,77.67 59.94,76.76 U4.31
  Bottom 0.152: v32.82,63.96 31.9,63.04 30.99,63.04 U1.10
V3.3  (via drill 0.35)
  Top 0.152: v118.16,80.11 115.57,77.52 S1.NC | J3.10 150.32,90.17 150.32,80.11 J3.12 | v135.99,150.06 135.99,143.51 C9.1 | v58.57,150.82 58.57,149.91 55.98,147.32 55.98,141.83 63.14,134.67 69.85,134.67 C1.1 69.85,134.52 70.92,133.45 72.75,133.45 81.13,125.07 v82.35,125.07 | L2.1 24.28,104.19 27.48,104.19 28.85,105.56 31.6,105.56 32.97,104.19 L1.1 33.12,104.04 v44.86,92.3 | v28.4,71.88 v29.62,70.66 | v25.96,70.51 25.96,69.29 v23.98,67.31 v23.98,65.48 25.96,63.5 v26.87,63.5 26.87,46.89 v35.1,38.66 | v44.86,87.58 52.32,87.58 61.47,78.44 61.47,76.61 U4.28
  Bottom 0.152: v118.16,80.11 150.16,80.11 J3.12 | 135.99,158.75 v135.99,150.06 144.98,141.07 167.54,141.07 C7.2 | 135.99,158.75 146.05,168.81 C8.2 | 135.99,158.75 126.7,158.75 124.1,161.34 116.48,161.34 109.02,168.81 107.95,168.81 C27.+ | 135.99,134.98 135.99,143.51 C9.1 | 135.99,134.98 135.99,117.3 158.39,94.89 158.39,92.76 154.89,89.26 152.76,89.26 151.84,90.17 150.47,90.17 J3.10 | v58.57,150.82 48.36,161.04 34.04,161.04 33.12,160.12 31.75,160.12 R17.2 | 82.96,124.46 82.96,118.21 U2.4 | v82.35,125.07 82.96,124.46 | v23.98,65.48 23.98,60.6 U1.24 | v23.98,67.31 23.52,67.31 23.37,67.46 22.45,67.46 U1.36 | v26.87,63.5 30.84,63.5 U1.9 | v29.62,70.66 29.46,70.51 29.46,69.14 U1.48 | v25.96,70.51 27.33,71.88 v28.4,71.88 32.36,71.88 32.97,72.49 32.97,75.23 44.86,87.12 v44.86,87.58 v44.86,92.3 50.8,98.25 50.8,120.96 64.36,134.52 69.85,134.52 C1.1 | v35.1,38.66 44.4,29.36 44.4,12.75 C26.1 | 135.99,134.98 105.36,134.98 104.6,135.74 94.23,135.74 82.96,124.46
V3.3A  (via drill 0.35)
  Top 0.152: R4.1 154.89,120.65 155.8,119.74 156.57,119.74 157.18,120.34 157.18,123.24 137.06,143.36 137.06,149.91 125.78,161.19 C10.1 125.63,161.34 119.53,161.34 109.47,171.4 64.82,171.4 58.27,164.85 50.04,164.85 49.28,164.08 | 49.28,164.08 49.28,163.47 44.55,158.75 44.55,154.94 R8.2 | 49.28,164.08 45.62,167.74 17.58,167.74 | 17.58,167.74 16.51,168.81 C18.+ | 64.67,70.05 63.75,70.05 U4.15 | 64.67,70.05 64.97,70.36 64.97,70.81 64.67,71.12 63.91,71.12 U4.17 | 60.1,66.85 59.94,67 59.94,67.92 U4.8 | 60.1,66.85 60.25,66.7 61.01,66.7 61.32,67 61.32,67.77 U4.11 | v58.27,66.7 57.96,67 57.96,68.22 U4.4 | 60.1,66.85 v59.79,66.55 | v61.93,70.05 61.93,72.03 63.14,73.25 64.06,73.25 U4.21 | 64.67,70.05 v65.13,69.6 71.53,63.2 v93.32,63.2 | C14.1 C15.1 8.89,146.25 17.58,154.94 17.58,167.74 | v32.66,65.94 32.66,66.7 21.08,78.28 21.08,81.94 15.14,87.88 3.56,87.88 R9.2
  Bottom 0.152: 128.37,16.41 130.96,16.41 132.03,15.34 C12.1 | 128.37,16.41 124.1,16.41 123.04,15.34 121.97,15.34 C13.1 | 128.37,16.41 128.37,46.89 C11.1 128.22,47.04 115.72,47.04 97.59,65.18 95.3,65.18 v93.32,63.2 | 59.64,66.7 v58.27,66.7 35.87,66.7 35.41,67.16 33.88,67.16 v32.66,65.94 | 61.93,69.6 61.93,68.99 59.64,66.7 | 61.93,69.6 v61.93,70.05 | 59.64,66.7 v59.79,66.55 | 61.93,69.6 v65.13,69.6 | 9.96,114.4 15.6,114.4 25.81,104.19 29.16,104.19 L2.2 | 9.96,114.4 8.89,115.47 C14.1 | 9.96,114.4 2.64,107.09 2.64,88.95 R9.2
V5.0  (via drill 0.35)
  Top 0.152: 61.77,35.31 61.77,34.54 61.62,34.39 61.47,34.39 60.86,33.78 U5.11 60.71,33.63 31.14,33.63 26.87,29.36 10.26,29.36 | 61.77,35.31 60.86,36.22 U5.9 | 10.26,29.36 4.93,29.36 C4.1 | 10.26,29.36 10.26,10.16 C5.2 | 61.77,35.31 v62.08,35.61
  Bottom 0.152: U3.3 72.44,45.97 v62.08,35.61
VIN  (via drill 0.35)
  Top 0.152: v75.64,129.64 80.82,124.46 C3.1 95.61,117.75 v95.61,64.57
  Bottom 0.152: C32.+ 30.38,170.18 12.85,152.65 12.85,146.86 13.46,146.25 17.73,146.25 18.64,147.17 28.09,147.17 D4.C 29.31,145.95 32.82,145.95 33.73,145.03 47.9,145.03 48.21,145.34 48.21,145.95 47.6,146.56 45.16,146.56 44.55,147.17 44.55,150.06 45.16,150.67 55.07,150.67 70,135.74 72.75,135.74 75.03,133.45 75.03,129.64 | 75.03,129.64 v75.64,129.64 | D5.C 75.03,129.64 | v95.61,64.57 114.2,45.97 U3.1